# Altium PCB PCB.PcbDoc (part 1 of 2)
Units mm, origin at the board's own origin, x right, y up, seen from the top; angles counter-clockwise.
Board outline 57.59 x 65.03 mm, 2 copper layers (Top Layer, Bottom Layer); 72 components, 52 nets, 225 pads, 55 vias.
Unrouted connection lines stored in the file: 25.
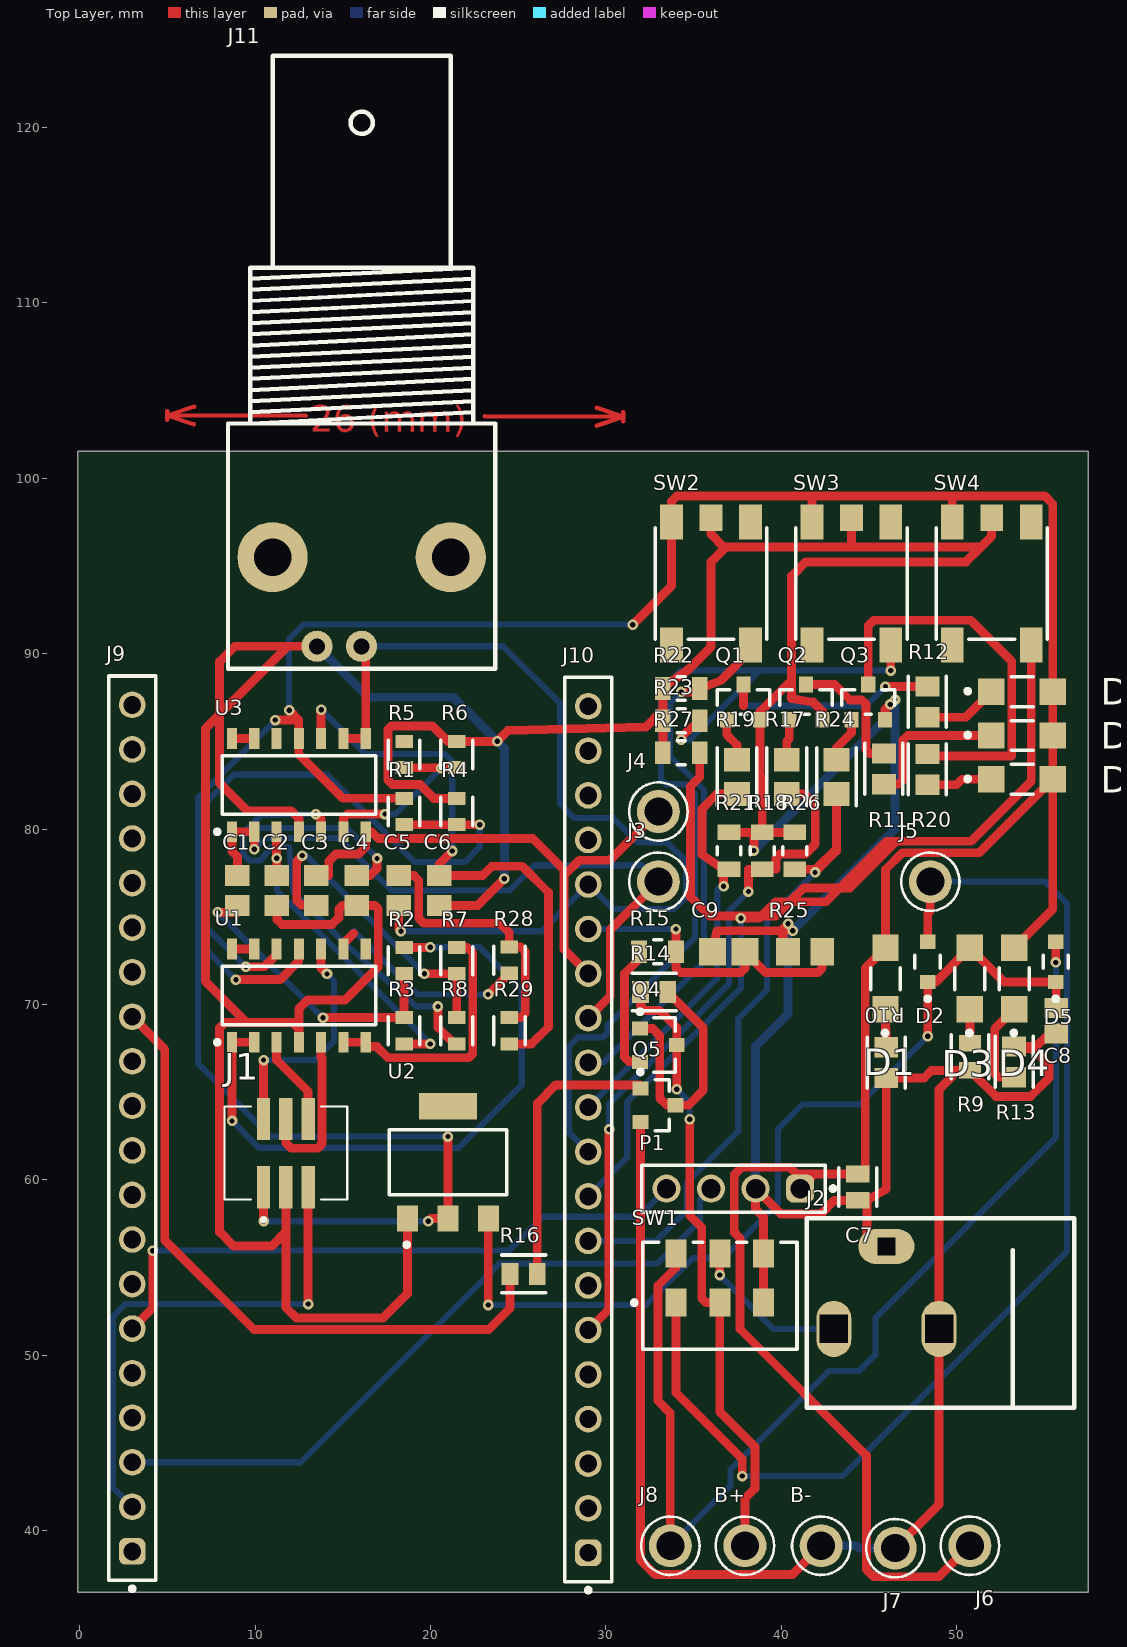
[diagram p0: Top Layer view]
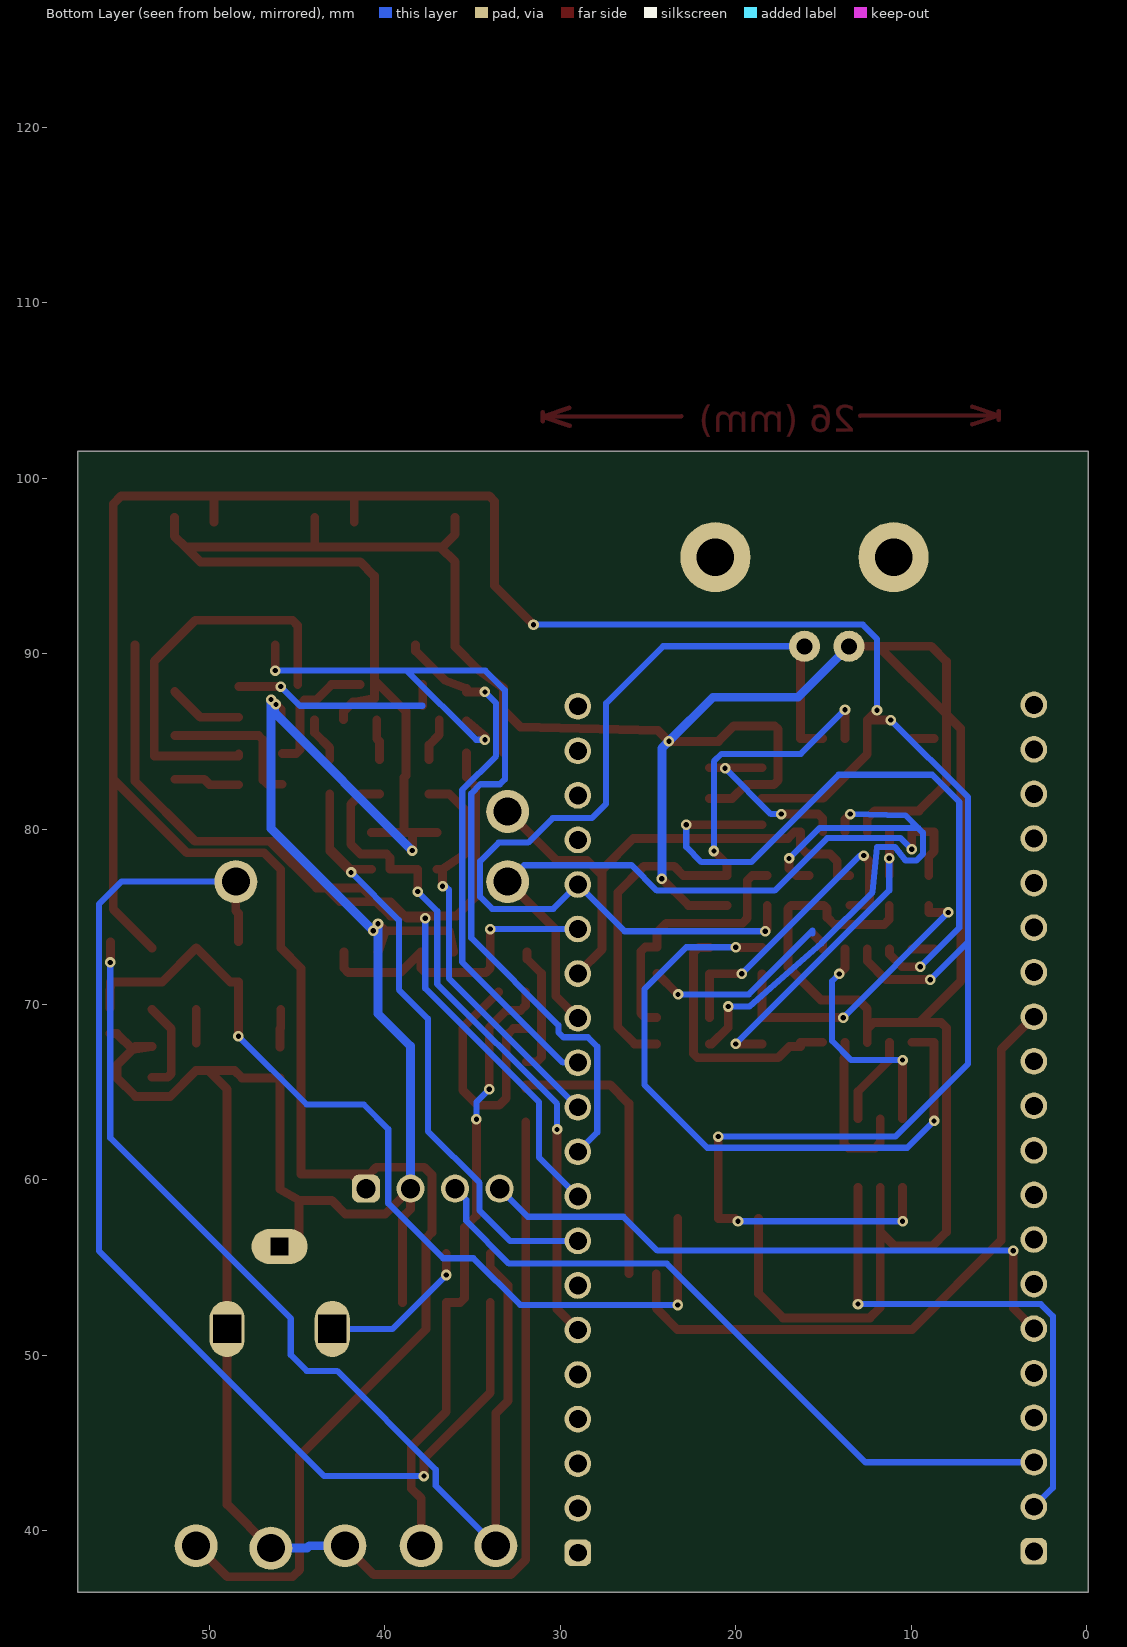
[diagram p1: Bottom Layer view, seen from below]
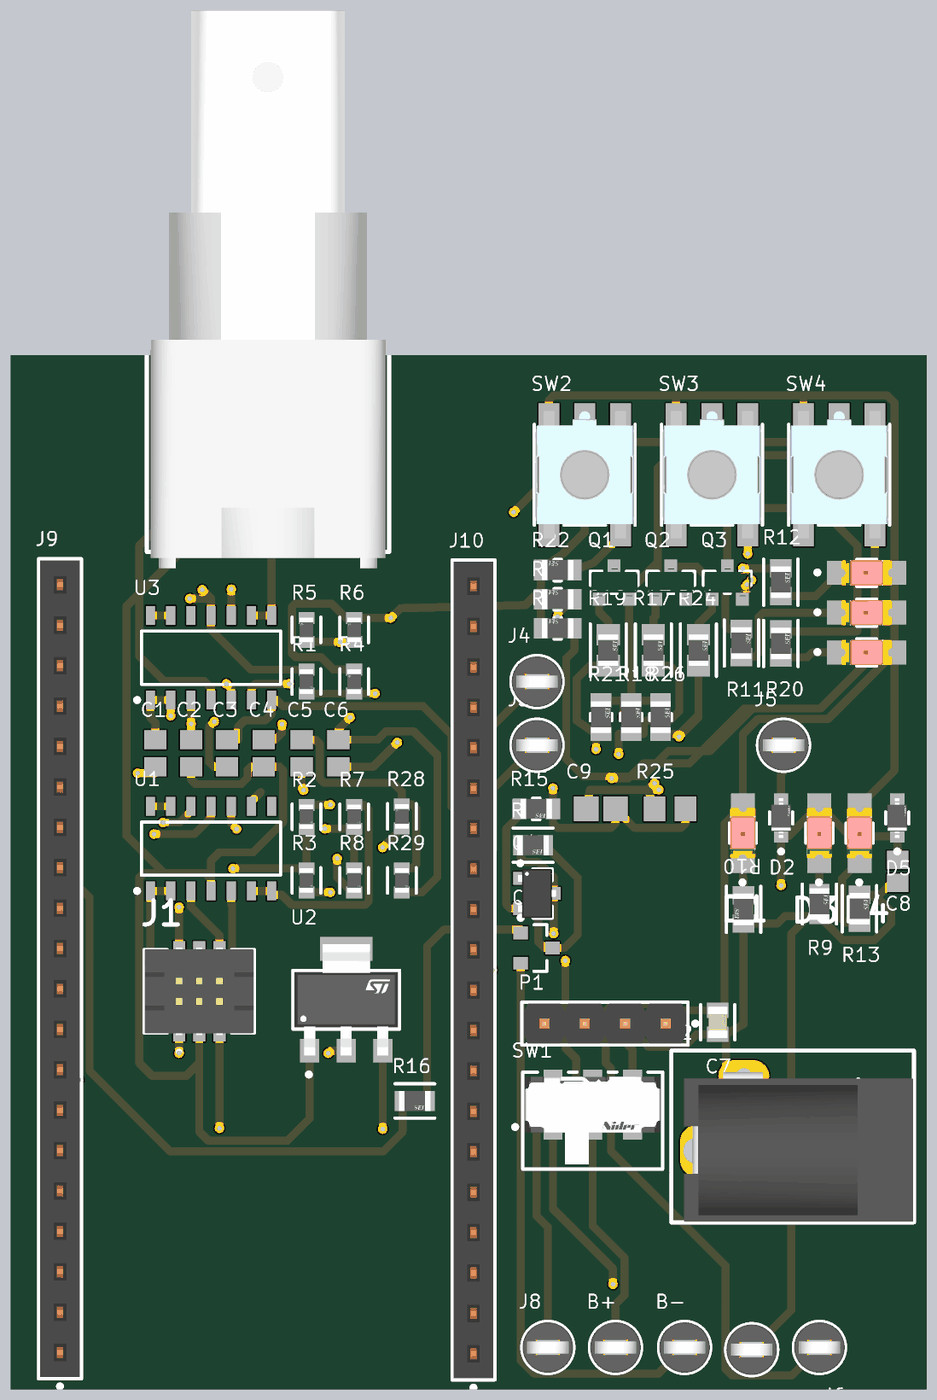
[diagram p2: 3D render of the assembled board from above, using the file's embedded part models]

## Layer stack, top to bottom
Top Solder: solder mask 0.0102, Solder Resist, Dk 3.5
Top Layer: signal copper 0.0356
Dielectric 1: dielectric 0.32, FR-4, Dk 4.8
Bottom Layer: signal copper 0.0356
Bottom Solder: solder mask 0.0102, Solder Resist, Dk 3.5

## Board outline
-0.094,36.5 57.5,36.5 57.5,101.532 -0.094,101.532

## Design rules (kind name [scope] priority, off if disabled: settings)
Clearance "Polygon Clearance" [InPolygon] p1: gap=0.254 ignorepadtopadclearanceinfootprint=TRUE
Clearance [All] p2: gap=0.152 ignorepadtopadclearanceinfootprint=TRUE
ComponentClearance [All] p1 off: gap=0.254 collisioncheckmode=3 verticalgap=0.254 showdistances=FALSE
FabricationTestPointUsage TestPointUsage [All] p1: valid=0 allowmultiple=FALSE
FabricationTestpoint Testpoint [All] p1: side=3 testpointundercomponent=TRUE minsize=1.016 maxsize=2.54 preferedsize=1.524 minholesize=0 maxholesize=1.016 preferedholesize=0.813 testpointgrid=0.025 allowsidetop=TRUE allowsidebottom=TRUE usegrid=TRUE gridtolerance=0
Height [All] p1: minheight=0 maxheight=55.4 prefheight=12.7
HoleSize [All] p1: absolutevalues=TRUE maxlimit=25.4 minlimit=0.2 maxpercent=80.000 minpercent=20.000
MinimumSolderMaskSliver [All] p1: minsoldermaskwidth=0.102
PlaneConnect [All] p1: planeconnectstyle=Relief reliefexpansion=0.254 reliefentries=4 reliefconductorwidth=0.254 reliefairgap=0.254
PolygonConnect PWRPolygonConnect [InNet('+V3.3') OR InNet('+V5') OR InNet('+VIN') OR InNetClass('GND')] p1: connectstyle=Relief reliefconductorwidth=0.305 reliefentries=4 polygonreliefangle="90 Angle" airgapwidth=0.254
PolygonConnect [All] p2: connectstyle=Relief reliefconductorwidth=0.305 reliefentries=4 polygonreliefangle="90 Angle" airgapwidth=0.254
RoutingVias [All] p1: holewidth=0.3 width=0.6 viastyle="Through Hole" minholewidth=0.3 minwidth=0.6 maxholewidth=0.3 maxwidth=0.6
SilkToSilkClearance [All] p1: silktosilkclearance=0.051
SilkToSolderMaskClearance SilkscreenOverComponentPads [All] p1: minsilkscreentomaskgap=0.051 clearancetoexposedcopper=TRUE
SolderMaskExpansion [All] p1: expansion=0.1 istentingtop=FALSE
SupplyNets "Schematic Supply Nets_3" [InNet('+3V3')] p1: voltage=0.000
SupplyNets "Schematic Supply Nets_2" [InNet('GND')] p2: voltage=0.000
Width "Width GND" [InNet('GND')] p1: maxlimit=0.508 minlimit=0.508 preferedwidth=0.508
Width "Width Power" [InNet('+V3.3') OR InNet('+V5') OR InNet('+VIN') OR InNetClass('PWR')] p2: maxlimit=0.508 minlimit=0.508 preferedwidth=0.508
Width [All] p3: maxlimit=0.5 minlimit=0.2 preferedwidth=0.5 bottomlayer_prefwidth=0.35 minimp=50.000000 maximp=50.000000 favimp=50.000000
21 further rules are at their usual default settings.

## Classes and differential pairs
component class "Top Level": J9 J10 J11
component class r: D6 D7 D8 P1 Q1 Q2 Q3 R11 R12 R17 R18 R19 R20 R21 R22 R23 R24 R26 R27 SW2 SW3 SW4
component class Sheet4: C1 C2 C3 C4 C5 C6 J3 J4 R1 R2 R3 R4 R5 R6 R7 R8 R28 R29 U1 U3
component class Sheet3: D1 J1 R10
component class Sheet2: B+ B+1 B- B-1 C7 C8 C9 D2 D3 D4 D5 J2 J5 J6 J7 J8 Q4 Q5 R9 R13 R14 R15 R16 R25 SW1 U2

## Components (designator, comment, footprint, x,y, rotation, side; value= is the part's Value field where it differs from the comment)
B+ "5006" FP-5006-MFG 37.933,39.14 r0 top
B- "5006" FP-5006-MFG 42.279,39.14 r0 top
C1 "33n" CAPC2013X95X45NL10T25 9,76.5 r90 top value="33 nF"
C2 "33n" CAPC2013X95X45NL10T25 11.246,76.5 r90 top value="33 nF"
C3 "33n" CAPC2013X95X45NL10T25 13.5,76.5 r90 top value="33 nF"
C4 "33n" CAPC2013X95X45NL10T25 15.802,76.5 r90 top value="33 nF"
C5 "33n" CAPC2013X95X45NL10T25 18.199,76.5 r90 top value="33 nF"
C6 "33n" CAPC2013X95X45NL10T25 20.503,76.5 r90 top value="33 nF"
C7 "0.1µF" FP-C0805C-DN-MFG 44.363,59.581 r270 top value="0.10 μF"
C8 "100nF" CAPC2013X94X50LL20T25 55.675,69.064 r90 top
C9 "10nF" CAPC2013X94X50ML20T25 37.011,73 r0 top value="10,000 pF"
D1 "LTST-C150KRKT" FP-LTST-C150KRKT-MFG 45.944,71.475 r90 top
D2 "CUS08F30,H3F" FP-USC-MFG 48.348,72.425 r90 top
D3 "LTST-C150KRKT" FP-LTST-C150KRKT-MFG 50.756,71.475 r90 top
D4 "LTST-C150KRKT" FP-LTST-C150KRKT-MFG 53.285,71.475 r90 top
D5 "CUS08F30,H3F" FP-USC-MFG 55.65,72.425 r90 top
D6 "LTST-C150KRKT" FP-LTST-C150KRKT-MFG 53.731,85.334 r0 top
D7 "LTST-C150KRKT" FP-LTST-C150KRKT-MFG 53.731,87.834 r0 top
D8 "LTST-C150KRKT" FP-LTST-C150KRKT-MFG 53.731,82.834 r0 top
J1 "20021221-00006C4LF" AMPHENOL_20021221-00006C4LF 11.759,61.53 r180 top
J2 "PJ-102AH" "CON Barrel PJ-102AH" 46,56.2 r180 top
J3 "5006" FP-5006-MFG 33,77 r0 top
J4 "5006" FP-5006-MFG 33,81 r0 top
J5 "5006" FP-5006-MFG 48.5,77 r0 top
J6 "5006" FP-5006-MFG 50.758,39.14 r0 top
J7 "5006" FP-5006-MFG 46.5,39 r0 top
J8 "5006" FP-5006-MFG 33.68,39.14 r0 top
J9 "61302011821" 61302011821 3,62.95 r90 top
J10 "61302011821" 61302011821 29,62.87 r90 top
J11 "CON BNC JACK R/A 50 OHM PCB" "CON BNC 90deg" 16.08,90.42 r270 top
P1 "61300411121" 61300411121 37.27,59.5 r180 top
Q1 "DMN2004K-7" FP-SOT23-MFG 37.849,87.234 r90 top
Q2 "DMN2004K-7" FP-SOT23-MFG 41.411,87.234 r90 top
Q3 "DMN2004K-7" FP-SOT23-MFG 44.963,87.234 r90 top
Q4 "SSM3J328R,LF" TOSH-SOT-23F_V 32.996,67.681 r0 top
Q5 "MMBT3904LT1G" ONSC-SOT-23-3-318-08_V 32.97,64.252 r0 top
R1 "160k" FP-CRCW0603-e3-MFG 18.5,81 r270 top
R2 "160k" FP-CRCW0603-e3-MFG 18.5,72.5 r270 top
R3 "160k" FP-CRCW0603-e3-MFG 18.5,68.5 r270 top
R4 "160k" FP-CRCW0603-e3-MFG 21.5,81 r90 top
R5 "160k" FP-CRCW0603-e3-MFG 18.5,84.25 r90 top
R6 "160k" FP-CRCW0603-e3-MFG 21.5,84.25 r90 top
R7 "160k" FP-CRCW0603-e3-MFG 21.5,72.5 r270 top
R8 "160k" FP-CRCW0603-e3-MFG 21.5,68.5 r270 top
R9 "3K" FP-RMCF0805-IPC_C 50.758,67.018 r90 top
R10 "300R" FP-RMCF0805-IPC_B 45.989,66.682 r270 top
R11 "300R" FP-RMCF0805-IPC_B 45.853,83.425 r90 top
R12 "300R" FP-RMCF0805-IPC_B 48.329,87.248 r90 top
R13 "300R" FP-RMCF0805-IPC_B 53.28,66.721 r90 top
R14 "RMCF0805FG100K" FP-RMCF0805-IPC_C 32.752,70.711 r0 top
R15 "10K" FP-RMCF0805-MFG 32.95,73 r0 top
R16 "RMCF0805FT1K00" FP-RMCF0805-IPC_C 25.313,54.64 r0 top
R17 "100R" FP-RMCF0805-IPC_A 40.315,82.975 r90 top
R18 "10K" FP-RMCF0805-MFG 38.92,78.763 r90 top
R19 "100R" FP-RMCF0805-IPC_A 37.48,82.975 r90 top
R20 "300R" FP-RMCF0805-IPC_B 48.329,83.4 r90 top
R21 "10K" FP-RMCF0805-MFG 37.024,78.763 r90 top
R22 "10K" FP-RMCF0805-MFG 34.3,88.009 r180 top
R23 "10K" FP-RMCF0805-MFG 34.3,86.175 r180 top
R24 "100R" FP-RMCF0805-IPC_A 43.15,82.975 r90 top
R25 "5.6K" RESC2013X70X40ML20T20 41.361,73 r0 top
R26 "10K" FP-RMCF0805-MFG 40.771,78.763 r90 top
R27 "10K" FP-RMCF0805-MFG 34.3,84.353 r180 top
R28 "16k" FP-CRCW0603-e3-MFG 24.5,72.525 r90 top
R29 "16k" FP-CRCW0603-e3-MFG 24.5,68.5 r270 top
SW1 "CL-SB-22A-11T" FP-CL-SB-22A-11T-MFG 36.5,53.4 r0 top
SW2 "431481031816" 431481031816 36,94 r270 top
SW3 "431481031816" 431481031816 44,94 r270 top
SW4 "431481031816" 431481031816 52,94 r270 top
U1 "LM324DR2G" ONSC-SOIC-14-751A-03_V 12.5,70.5 r90 top
U2 "LDO 3.3V" FP-SOT-223-0046067_14-MFG 21,61 r90 top
U3 "LM324DR2G" ONSC-SOIC-14-751A-03_V 12.5,82.5 r90 top

## Footprints (in the part's own frame and the unit in brackets; to place one, negate y for a bottom-side part, rotate by r counter-clockwise, add the part's x,y. Pads: shape width x height; smd on the part's side, far side on the other; paste and mask are expansions set on the pad)
61300411121 [mm] "Pin Header, pitch 2.54 mm, THT, Vertical, single row, 4p"
  rrect50% 1.6x1.6 hole 1.1: 1(-3.81,0)
  round 1.6 hole 1.1: 2(-1.27,0) 3(1.27,0) 4(3.81,0)
  silkscreen extent -5.8,-1.34 5.23,1.35, body extent -5.08,-1.27 5.08,1.27, height 8.57
61302011821 [mm] "Socket Header, Pitch 2.54 mm, THT, Vertical, single row, 20p"
  rrect50% 1.52x1.52 hole 1.02: 1(-24.13,0)
  round 1.52 hole 1.02: 2(-21.59,0) 3(-19.05,0) 4(-16.51,0) 5(-13.97,0) 6(-11.43,0) 7(-8.89,0) 8(-6.35,0) 9(-3.81,0) 10(-1.27,0) 11(1.27,0) 12(3.81,0) 13(6.35,0) 14(8.89,0) 15(11.43,0) 16(13.97,0) 17(16.51,0) 18(19.05,0) 19(21.59,0) 20(24.13,0)
  silkscreen extent -26.38,-1.35 25.78,1.35, body extent -25.65,-1.25 25.65,1.25, height 8.55
431481031816 [mm] "SMD Tact Switch, body 6x6mm"
  rect 2x1.3 smd: A1(-3.5,-2.25) A2(3.5,-2.25) B1(-3.5,2.25) B2(3.5,2.25)
  rect 1.5x1.3 smd: G1(-3.75,0)
  silkscreen extent -3.18,-3.18 3.18,3.18, body extent -4,-3.1 4,3.1, height 3.1
AMPHENOL_20021221-00006C4LF [mm]
  rect 0.76x2.4 smd: 1(1.27,1.95) 2(1.27,-1.95) 3(0,1.95) 4(0,-1.95) 5(-1.27,1.95) 6(-1.27,-1.95)
  silkscreen extent -3.49,-2.65 3.49,3.91, body extent -3.4,-2.75 3.4,2.75, height 5.6
CAPC2013X94X50LL20T25 [mm] "Chip Capacitor, 2-Leads, Body 2.01x1.25mm, IPC High Density"
  rect 1.15x1.35 smd: 1(-0.725,0) 2(0.725,0)
  body extent -1.1,-0.72 1.1,0.72, height 0.94
CAPC2013X94X50ML20T25 [mm] "Chip Capacitor, 2-Leads, Body 2.01x1.25mm, IPC Low Density"
  rect 1.55x1.55 smd: 1(-0.925,0) 2(0.925,0)
  body extent -1.1,-0.72 1.11,0.72, height 0.94
CAPC2013X95X45NL10T25 [mm] "Chip Capacitor, 2-Leads, Body 2.00x1.25mm, IPC Medium Density"
  rect 1.2x1.4 smd: 1(-0.85,0) 2(0.85,0)
  body extent -1.05,-0.67 1.05,0.67, height 0.95
"CON Barrel PJ-102AH" [mm] "5.5mm Barrel Plug (2.1mm ID)"
  oval 2x3.2 hole 1.6 square: 1(3,4.7) 2(-3,4.7)
  oval 3.2x2 hole 1 square: 3(0,0)
  silkscreen extent -10.7,-1.6 4.55,9.2, body extent -10.65,-0.25 3.75,9.15, height 11.01
"CON BNC 90deg" [mil] "BNC INSULATED 90 Degrees"
  round 70 hole 36: 1(0,0) 2(0,-100)
  round 157.48 hole 84: ""(-200,200) ""(-200,-200)
  silkscreen extent -1325,-300 50,300, body extent -1290,-290 90,291, height 605
FP-5006-MFG [mm]
  round 2.45 hole 1.6 paste-2539.97 mask+0: 1(0,0)
  silkscreen extent -1.66,-1.66 1.67,1.66, body extent -1.77,-1.77 1.77,1.77, height 0.25
FP-C0805C-DN-MFG [mm]
  rect 0.95x1.35 smd paste+0 mask+0: 1(-0.75,0) 2(0.75,0)
  silkscreen extent -1.1,-1.08 1.1,1.07, body extent -1.4,-0.85 1.4,0.85, height 0.25
FP-CL-SB-22A-11T-MFG [mm]
  rect 1.2x1.6 smd paste+0 mask+0: 1(-2.5,-0.4) 2(0,-0.4) 3(2.5,-0.4) 4(-2.5,2.4) 5(0,2.4) 6(2.5,2.4)
  silkscreen extent -5,-3.05 4.4,3.05, body extent -4.5,-3.15 4.5,3.3, height 0.25
FP-CRCW0603-e3-MFG [mm]
  rect 0.75x1 smd paste+0 mask+0: 1(-0.75,0) 2(0.75,0)
  silkscreen extent -0.8,-0.9 0.8,0.9, body extent -1.22,-0.6 1.22,0.6, height 0.25
FP-LTST-C150KRKT-MFG [mm]
  rect 1.5x1.5 smd paste+0 mask+0: 1(-1.75,0) 2(1.75,0)
  silkscreen extent -3.22,-0.85 0.63,0.85, body extent -2.6,-0.95 2.6,0.95, height 0.25
FP-RMCF0805-IPC_A [mm]
  rect 1.355x1.462 smd paste+0 mask+0: 1(-0.976,0) 2(0.976,0)
  silkscreen extent -1.65,-1.13 1.65,1.13, body extent -2.15,-1.23 2.15,1.23, height 0.25
FP-RMCF0805-IPC_B [mm]
  rect 1.155x1.362 smd paste+0 mask+0: 1(-0.876,0) 2(0.876,0)
  silkscreen extent -1.45,-1.08 1.45,1.08, body extent -1.7,-0.93 1.7,0.93, height 0.25
FP-RMCF0805-IPC_C [mm]
  rect 0.955x1.262 smd paste+0 mask+0: 1(-0.776,0) 2(0.776,0)
  silkscreen extent -1.25,-1.08 1.25,1.07, body extent -1.35,-0.77 1.35,0.77, height 0.25
FP-RMCF0805-MFG [mm]
  rect 0.9x1.3 smd paste+0 mask+0: 1(-1.05,0) 2(1.05,0)
  silkscreen extent -0.22,-0.68 0.23,0.67, body extent -1.6,-0.77 1.6,0.77, height 0.25
FP-SOT23-MFG [mm]
  rect 0.9x0.8 smd paste+0 mask+0: 1(-1,0.95) 2(-1,-0.95) 3(1,0)
  silkscreen extent -0.7,-1.5 0.7,1.5, body extent -1.55,-1.6 1.55,1.6, height 0.25
FP-SOT-223-0046067_14-MFG [mm]
  rect 1.5x1.2 smd paste+0 mask+0: 1(-3.2,2.3) 2(-3.2,0) 3(-3.2,-2.3)
  rect 1.5x3.3 smd paste+0 mask+0: 4(3.2,0)
  silkscreen extent -4.82,-3.35 1.85,3.35, body extent -4.05,-3.45 4.05,3.45, height 0.25
FP-USC-MFG [mm]
  rect 0.8x0.9 smd paste+0 mask+0: 1(-1.15,0) 2(1.15,0)
  silkscreen extent -2.22,-0.73 0.37,0.72, body extent -1.65,-0.82 1.65,0.82, height 0.25
ONSC-SOIC-14-751A-03_V [mm] "SOIC, 14-Leads, Body 8.75x4mm, Pitch 1.27mm"
  rect 1.18x0.58 smd: 1(-2.66,3.81) 2(-2.66,2.54) 3(-2.66,1.27) 4(-2.66,0) 5(-2.66,-1.27) 6(-2.66,-2.54) 7(-2.66,-3.81) 8(2.66,-3.81) 9(2.66,-2.54) 10(2.66,-1.27) 11(2.66,0) 12(2.66,1.27) 13(2.66,2.54) 14(2.66,3.81)
  silkscreen extent -2.78,-4.37 1.67,4.77, body extent -2,-4.38 2,4.38, height 1.75
ONSC-SOT-23-3-318-08_V [mm] "SOT23, 3-Leads, Body 2.92x1.3mm, Pitch 0.95mm"
  rect 0.9x0.8 smd: 1(-1,0.95) 2(-1,-0.95) 3(1,0)
  silkscreen extent -1.12,-1.46 0.65,2.02, body extent -0.65,-1.46 0.65,1.46, height 1.11
RESC2013X70X40ML20T20 [mm] "Chip Resistor, 2-Leads, Body 2.00x1.25mm, IPC Low Density"
  rect 1.35x1.55 smd: 1(-0.975,0) 2(0.975,0)
  body extent -1.1,-0.72 1.1,0.72, height 0.7
TOSH-SOT-23F_V [mm] "SOTFL, 3-Leads, Body 3.1x1.9mm, Pitch 0.95mm"
  rect 0.9x0.8 smd: 1(-1.05,0.95) 2(-1.05,-0.95) 3(1.05,0)
  silkscreen extent -1.17,-1.55 0.95,2.02, body extent -1.2,-1.55 1.2,1.55, height 0.88

## Part data
B+ B- J3 J4 J5 J6 J7 J8: library part CMP-19636-000022-1, "PC TEST POINT COMPACT BLACK", Color=Black, Flammability Rating="UL94 V-0", Package Quantity=100, Body Material=Bronze, Contact Material=Bronze, Contact Plating=Tin, Height=0.35inch, Hole Diameter=1.6mm, Housing Color=Black, Inside Diameter=1.78mm, Insulation Material=Nylon, Lead Free="Lead Free", Length=8.89mm, Material=Nylon, Mount=PCB, Number of Ports=1, Orientation=Straight, Outside Diameter=3.18mm, Packaging=Bulk, Plating=Silver, REACH SVHC="No SVHC", RoHS Compliant=Yes, Series=THM
C1 C2 C3 C4 C5 C6: library part CMP-03422-000099-1, "CAP CER 0.033UF 50V X7R 0805, CC0805KRX7R9BB333", Capacitance="33 nF", Manufacturer=Yageo, Manufacturer Part Number=CC0805KRX7R9BB333, Package=CC0805-0.85, Temperature="-30°C to +85°C", Temperature Characteristic=X7R, Temperature Range High=+85°C, Temperature Range Low=-30°C, Tolerance=0.1, Voltage Rating="50 V", Automotive=No, Category=Cap, ComponentLink2Description=Datasheet, ComponentLink2URL=http://www.yageo.com/documents/recent/UPY-GPHC_Y5V_6.3V-to-50V_8.pdf, Device Class L1="Passive Components", Device Class L2=Capacitors, Device Class L3="Ceramic Capacitors", Digikey Description="CAP CER 0.033UF 50V X7R 0805", Footprint Url=http://www.yageo.com/exep/pages/download/literatures/UPY-C_GEN_24.pdf, Height=0.95mm, Ipc Land Pattern Name=CAPC200125X85, Lead Free=Yes, Material=Ceramic, Mouser Description="Multilayer Ceramic Capacitors MLCC - SMD/SMT 33nF 50V X7R 10%", Octopart=https://octopart.com/cc0805krx7r9bb333-yageo-42333931, RoHS=TRUE
C7: library part CMP-03020-000950-1, "CAP CER 0.1UF 50V X7R 0805", Capacitance="0.10 μF", Manufacturer=KEMET, Manufacturer Part Number=C0805C104J5RACTU, Package=C0805C-DN, Temperature="-55°C to +125°C", Temperature Characteristic=X7R, Temperature Coefficient=30ppm/°C, Temperature Range High=+125°C, Temperature Range Low=-55°C, Tolerance=0.05, Voltage Rating="50 V", Automotive=No, Category=Cap, ComponentLink2Description=Datasheet, ComponentLink2URL=https://content.kemet.com/datasheets/KEM_C1003_C0G_SMD.pdf, Device Class L1="Passive Components", Device Class L2=Capacitors, Device Class L3="Ceramic Capacitors", Digikey Description="CAP CER 0.1UF 50V X7R 0805", Height=0.88mm, Ipc Land Pattern Name=CAPC200125X78, Lead Free=Yes, Material=Ceramic, Mouser Description="Multilayer Ceramic Capacitors MLCC - SMD/SMT 50volts 0.1uF X7R 5%", Octopart=https://octopart.com/c0805c104j5ractu-kemet-104634, RoHS=TRUE
C8: library part CMP-2007-04369-1, Manufacturer="AVX Interconnect / Elco", Part Number=08055C104JAZ2A
C9: library part CMP-2007-01173-3, "CAP CER SMD 0805 .01UF X7R 5% 50, C0805C103J5RAC7210", Capacitance="10,000 pF", Manufacturer=KEMET, Manufacturer Part Number=C0805C103J5RAC7210, Package=C0805C-DN, Temperature="-55°C to +125°C", Temperature Characteristic=X7R, Temperature Coefficient=30ppm/°C, Temperature Range High=+125°C, Temperature Range Low=-55°C, Tolerance=0.05, Voltage Rating="50 V", Automotive=No, Category=Cap, ComponentLink2Description=Datasheet, ComponentLink2URL=https://content.kemet.com/datasheets/KEM_C1003_C0G_SMD.pdf, Device Class L1="Passive Components", Device Class L2=Capacitors, Device Class L3="Ceramic Capacitors", Digikey Description="CAP CER SMD 0805 .01UF X7R 5% 50", Height=0.88mm, Ipc Land Pattern Name=CAPC200125X78, Lead Free=Yes, Material=Ceramic, Mouser Description="Cap Ceramic 0.01uF 50V X7R 5% Pad SMD 0805 125C T/R", Octopart=https://octopart.com/c0805c103j5rac7210-kemet-3921106, RoHS=TRUE
D1 D3 D4 D6 D7 D8: library part CMP-2000-06617-2, "LED RED CLEAR 1206 SMD", Case Code (Imperial)=1206, Case Code (Metric)=3216, Color=Red, Forward Current=30mA, Forward Voltage=2V, Lens Color=Colorless, Max Operating Temperature=85°C, Min Operating Temperature=-30°C, Package Quantity=1, Power Dissipation=62.5mW, Power Rating=75mW, Reverse Voltage=5V, Test Current=20mA, Case/Package=1206, Depth=1.6mm, Dominant Wavelength=631nm, Height=1.1mm, Illumination Color=Red, Lead Free="Lead Free", Length=3.2mm, Lens Style=Diffused, Lens Transparency=Clear, Luminous Intensity=54mcd, Mount="Surface Mount", Number of Elements=1, Number of LEDs=1, Number of Pins=2, Packaging="Tape and Reel", Radiation Hardening=No, Viewing Angle=130°, Wavelength=639nm, Width=1.6mm
D2 D5: library part CMP-00375-53632863-1, "CUS08F30,H3F Rectifier Diode, Schottky, 1 Phase, 1 Element, 0.8A, 30V V(RRM), Silicon", Average Rectified Current=800mA, Capacitance=170pF, Case/Package=SOD, Max Forward Surge Current (Ifsm)=5A, Max Junction Temperature (Tj)=125°C, Max Repetitive Reverse Voltage (Vrrm)=30V, Min Operating Temperature=-55°C, Peak Reverse Current=50µA, Contact Plating="Silver, Tin", Element Configuration=Single, Forward Current=800mA, Height=1.15mm, Max Operating Temperature=125°C, Max Reverse Voltage (DC)=30V, Mount="Surface Mount", NexarPartId=53632863, Number of Pins=2, Packaging=Digi-Reel®, Peak Non-Repetitive Surge Current=5A, Reverse Voltage=30V, RoHS=Compliant, Schedule B="8541100080, 8541100080"
J1: "Minitek127®, Wire to Board connector, Shrouded vertical header, Surface Mount, Double Row, 6 Positions, 1.27mm (0.500in) Pitch", Package=None, Supplier Part Number 1=609-3699-1-ND, Check_prices=https://www.snapeda.com/parts/20021221-00006C4LF/Framatome+Connectors/view-part/?ref=eda, MF=FCI, MP=20021221-00006C4LF, SnapEDA_Link=https://www.snapeda.com/parts/20021221-00006C4LF/Framatome+Connectors/view-part/?ref=snap, Supplier 1=Digikey, Supplier 2=Digikey, Supplier Part Number 2=609-3699-1-ND
J2: library part "CON PWR PJ-102AH", "2.0 x 6.5 mm, 5.0 A, Horizontal, Through Hole, Tapered Pins, Dc Power Jack Connector", Manufacturer="CUI Devices", Supplier Part Number=CP-102AH-ND, ComponentLink1Description=https://datasheet.octopart.com/PJ-102AH-Same-Sky-datasheet-182049965.pdf?src-supplier=Future+Electronics, ComponentLink1URL=https://datasheet.octopart.com/PJ-102AH-Same-Sky-datasheet-182049965.pdf?src-supplier=Future+Electronics, ComponentLink2Description=http://www.cui.com/Product/Resource/FuturePDF/PJ-102AH.pdf?src-supplier=Future+Electronics, ComponentLink2URL=http://www.cui.com/Product/Resource/FuturePDF/PJ-102AH.pdf?src-supplier=Future+Electronics, ComponentLink3Description=https://datasheet.octopart.com/PJ-102AH-Same-Sky-datasheet-182881008.pdf?src-supplier=Electro+Sonic, ComponentLink3URL=https://datasheet.octopart.com/PJ-102AH-Same-Sky-datasheet-182881008.pdf?src-supplier=Electro+Sonic, Digikey Order=CP-102AH-ND, Manufacturer Code=PJ-102AH, Manufacturer Part Number=PJ-102AH, Pricing="1=0.76, 10=0.646, 25=0.6056, 50=0.5766, 200=0.5227, 400=0.4977, 600=0.48367, 1000=0.46653, 2600=0.43611 (USD)", RoHS=No, Stock=44670, Supplier=Digikey, Supplier 1="Arrow Electronics", Supplier 2=Digikey, Supplier Part Number 1=PJ-102AH, Supplier Part Number 2=CP-102AH-ND
J9 J10: library part CMP-1502-01348-3, Contact Resistance=20mΩ, Current Rating=3A, Operating Supply Voltage=250V, Gender=Female, Lead Pitch=2.54mm, NexarPartId=61924744, Number of Pins=20, Orientation=Vertical, RoHS=Non-Compliant
J11: "BNC Connector Jack, Female Socket 50Ohm Panel Mount, Through Hole, Right Angle Solder", Manufacturer="TE Connectivity AMP Connectors", Manufacturer Code=1-1634613-0, Supplier Part Number 1=A32261-ND, Digikey Order=A97554-ND, Supplier 1=Digikey, Supplier 2=Rs, Supplier Part Number 2=6807399
P1: library part CMP-1502-01064-3, Color=Black, Contact Resistance=20mΩ, Current Rating=3A, Max Operating Temperature=105°C, Min Operating Temperature=-40°C, Operating Supply Voltage=250V, Connector Type="Male Pin", Contact Material=Copper, Contact Mating Length=5.9944mm, Contact Plating=Gold, Gender=Male, Height=8.89mm, Lead Free="Lead Free", Lead Pitch=2.54mm, Mount="Through Hole", NexarPartId=32855522, Number Of Contacts=4, Number of Pins=4, Number of Positions=4, Number of Rows=1, Orientation=Vertical, Packaging=Bulk, Pitch=2.54mm, REACH SVHC=Unknown, RoHS=Compliant, Termination=Solder, Voltage Rating=250V
Q1 Q2 Q3: library part CMP-12801-000057-1, "MOSFET N-CH 20V 0.63A SOT23-3", Continuous Drain Current=630mA, Drain To Source Breakdown Voltage=20V, Drain To Source Resistance=0.4Ω, Gate To Source Voltage=8V, Input Capacitace At Vds="150pF @ 16V", Manufacturer="Diodes Inc.", Max Forward Diode Voltage=1V, Max Junction Temp=+150°C, Package=SOT23, Power Dissipation=350mW, Pulse Drain Current=1.5A, Temperature="-65°C to +150°C", Temperature Range Low=-65°C, Automotive=Yes, Automotive Grade="Grade 0", Category=Trans, ComponentLink2Description=Datasheet, ComponentLink2URL=https://www.diodes.com/assets/Datasheets/ds30938.pdf, Depletion Mode=False, Device Class L1="Discrete Semiconductors", Device Class L2=Transistors, Device Class L3=MOSFETs, Digikey Description="MOSFET N-CH 20V 0.63A SOT23-3", Drain To Source Voltage=20V, Footprint Url=https://www.diodes.com/assets/Package-Files/SOT23.pdf, Gate Charge At Vgs="0.9nC @ 4.5V", Height=1.1mm, Lead Free=Yes, Manufacturer Part Number=DMN2004K-7, Mouser Description="MOSFET 20V 540mA", Number Of Channels=1, Number Of N Channels=1, Octopart=https://octopart.com/dmn2004k-7-diodes+inc.-7127688, Reverse Recovery Charge=0.85nC, Reverse Recovery Time=5.5ns, RoHS=TRUE, Rthja Max=357°C/W, Standoff Height=0.013mm, Temperature Range High=+150°C, Threshold Vgs Max=1V, Threshold Vgs Min=0.5V, Turn Off Delay Time=59.4ns, Turn On Delay Time=5.7ns
Q4: library part CMP-2100-03686-1, "TOSHIBA Field-Effect Transistor Silicon P-Channel MOS Type (U-MOS VI), 20 V, -55 to 125 degC, 3-Pin SOTFL, RoHS, Tape and Reel", Package Quantity=3000, Package Description="3-Pin Small Outline Transistor, Flat Lead, Body 2.9 x 1.8 mm, Pitch 0.95 mm", Package Reference=SOT-23F, Drain To Source Breakdown Voltage=-20V, Power Dissipation=2W, Min Operating Temperature=-55degC, Max Operating Temperature=150degC, Manufacturer=Toshiba, Input Capacitance=840pF, Gate to Source Voltage (Vgs)=8V, Drain to Source Voltage (Vdss)=20V, Drain To Source Resistance=47.4mOhm, Continuous Drain Current (ID)=6A, Case/Package=SOT-23-3, Max Power Dissipation=1W, Number of Elements=1, Number Of Channels=1, Number of Pins=3, Packaging=TapeandReel, Radiation Hardening=No, Rds On Max=29.8mOhm, Mount=SurfaceMount, RoHSCompliant=true, Package URL=https://toshiba.semicon-storage.com/ap-en/design-support/package/detail.SOT-23F.html, Turn-On Delay Time=32ns, Manufacturer URL=http://www.toshiba.com/, Element Configuration=Single, Turn-Off Delay Time=107ns, Datasheet Version=41699.0, Datasheet URL=https://toshiba.semicon-storage.com/info/docget.jsp?did=2429&prodName=SSM3J328R
Q5: library part CMP-1048-00631-1, "General Purpose Transistor, NPN Silicon, 3-Pin SOT-23, Pb-Free, Tape and Reel", Manufacturer="On Semiconductor", IC Continuous (A)=0.2, PartNumber=MMBT3904LT1G, Packing="Tape and Reel", PackageVersion="Rev. AP, 11/2009", PackageReference=SOT-23-3-318-08, PackageDescription="3-Pin Small Outline Transistor, Body 2.92 x 1.3 mm, Pitch 0.95 mm", Mounting Technology="Surface Mount", fT Min (MHz)=300, RoHS=TRUE, ComponentLink3URL=http://www.onsemi.cn/pub_link/Collateral/318-08.PDF, ComponentLink3Description="Package Specification", ComponentLink2URL=http://www.onsemi.cn/pub_link/Collateral/MMBT3904LT1-D.PDF, ComponentLink2Description=Datasheet, ComponentLink1URL=http://www.onsemi.com/, ComponentLink1Description="Manufacturer URL", Polarity=NPN, DatasheetVersion="Rev. 12"
R1 R2 R3 R4 R5 R6 R7 R8 R28 R29: library part CMP-26527-003058-1, "160kΩ ±5% 0.125W 0805 Thick Film Chip Resistor AEC-Q200 compliant, RMCF0805JT160K", Case Code (Imperial)=0805, Case Code (Metric)=2012, Max Operating Temperature=155°C, Max Power Dissipation=125mW, Min Operating Temperature=-55°C, Resistance=160kR, Resistor Type="Thick Film", Temperature Coefficient=200ppm/°C, Tolerance=5%, Case/Package=0805, Contact Plating=Tin, Features="Automotive AEC-Q200", Height=0.026inch, Lead Free="Lead Free", Length=0.079inch, Mount="Surface Mount", Number of Terminations=2, Packaging="Tape and Reel", Radiation Hardening=No, RoHS Compliant=Yes, Series=RMCF, Width=0.049inch
R9: library part CMP-26527-006913-1, "3kΩ ±5% 0.125W 0805 Thick Film Chip Resistor AEC-Q200 compliant", Case Code (Imperial)=0805, Case Code (Metric)=2012, Max Operating Temperature=155°C, Max Power Dissipation=125mW, Min Operating Temperature=-55°C, Resistance=3kR, Resistor Type="Thick Film", Temperature Coefficient=200ppm/°C, Tolerance=5%, Case/Package=0805, Construction=Rectangular, Contact Plating=Tin, Depth=1.25mm, Features="Automotive AEC-Q200", Height=0.026inch, Length=0.079inch, Military Standard=Not, Mount="Surface Mount", Number of Terminations=2, Packaging="Tape and Reel", Radiation Hardening=No, RoHS Compliant=Yes, Series=RMCF, Width=0.049inch
R10: library part CMP-26527-003681-1, "300Ω ±5% 0.125W 0805 Thick Film Chip Resistor AEC-Q200 compliant, RMCF0805JT300R", Case Code (Imperial)=0805, Case Code (Metric)=2012, Max Operating Temperature=155°C, Max Power Dissipation=125mW, Min Operating Temperature=-55°C, Temperature Coefficient=200ppm/°C, Tolerance=5%, Package Quantity=5000, Resistor Type="Thick Film", Case/Package=0805, Contact Plating=Tin, Features="Automotive AEC-Q200", Height=0.026inch, Length=0.079inch, Number of Terminations=2, Packaging="Tape and Reel", Radiation Hardening=No, Resistance=300R, Width=0.049inch, Mount="Surface Mount", Series=RMCF, RoHS Compliant=Yes
R11 R20: library part CMP-26527-003681-1, "300Ω ±5% 0.125W 0805 Thick Film Chip Resistor AEC-Q200 compliant, RMCF0805JT300R", Resistor Type="Thick Film", Package Quantity=5000, Temperature Coefficient=200ppm/°C, Max Power Dissipation=125mW, Max Operating Temperature=155°C, Case/Package=0805, Case Code (Metric)=2012, Tolerance=5%, Min Operating Temperature=-55°C, Number of Terminations=2, Series=RMCF, RoHS Compliant=Yes, Resistance=300R, Radiation Hardening=No, Packaging="Tape and Reel", Mount="Surface Mount", Width=0.049inch, Length=0.079inch, Height=0.026inch, Features="Automotive AEC-Q200", Contact Plating=Tin, Case Code (Imperial)=0805
R12: library part CMP-26527-003681-1, "300Ω ±5% 0.125W 0805 Thick Film Chip Resistor AEC-Q200 compliant, RMCF0805JT300R", Temperature Coefficient=200ppm/°C, Tolerance=5%, Case Code (Metric)=2012, Case/Package=0805, Max Operating Temperature=155°C, Max Power Dissipation=125mW, Package Quantity=5000, Min Operating Temperature=-55°C, Resistor Type="Thick Film", Height=0.026inch, Resistance=300R, Series=RMCF, Contact Plating=Tin, Features="Automotive AEC-Q200", Length=0.079inch, Width=0.049inch, Number of Terminations=2, RoHS Compliant=Yes, Packaging="Tape and Reel", Radiation Hardening=No, Case Code (Imperial)=0805, Mount="Surface Mount"
R13: library part CMP-26527-003681-1, "300Ω ±5% 0.125W 0805 Thick Film Chip Resistor AEC-Q200 compliant, RMCF0805JT300R", Case/Package=0805, Tolerance=5%, Min Operating Temperature=-55°C, Package Quantity=5000, Resistor Type="Thick Film", Max Power Dissipation=125mW, Max Operating Temperature=155°C, Case Code (Metric)=2012, Temperature Coefficient=200ppm/°C, Resistance=300R, RoHS Compliant=Yes, Mount="Surface Mount", Number of Terminations=2, Radiation Hardening=No, Series=RMCF, Packaging="Tape and Reel", Width=0.049inch, Height=0.026inch, Features="Automotive AEC-Q200", Contact Plating=Tin, Case Code (Imperial)=0805, Length=0.079inch
R14: library part CMP-26527-003818-1, "100kΩ ±1% 0.125W 0805 Thick Film Chip Resistor AEC-Q200 compliant", Case/Package=0805, Resistance=100kR, Tolerance=1%, Min Operating Temperature=-55°C, Max Power Dissipation=125mW, Resistor Type="Thick Film", Package Quantity=10000, Max Operating Temperature=155°C, Case Code (Metric)=2012, Temperature Coefficient=100ppm/°C, RoHS Compliant=Yes, Military Standard=Not, Mount="Surface Mount", Number of Terminations=2, Radiation Hardening=No, Packaging="Tape and Reel", Series=RMCF, Width=0.049inch, Height=0.026inch, Features="Automotive AEC-Q200", Depth=1.25mm, Contact Plating=Tin, Construction=Rectangular, Case Code (Imperial)=0805, Length=0.079inch
R15 R22: library part CMP-26527-000121-1, "RES 10K OHM 1% 1/8W 0805, RMCF0805FT10K0", Case/Package=0805, Power Rating=125mW, Resistance=10kR, Tolerance=1%, Min Operating Temperature=-55°C, Resistor Type="Thick Film", Max Operating Temperature=155°C, Case Code (Metric)=2012, Temperature Coefficient=100ppm/°C, Lead Free="Lead Free", RoHS Compliant=Yes, Military Standard=Not, Mount="Surface Mount", Number of Terminations=2, Series=RMCF, Radiation Hardening=No, Size Code=0805, Max Power Dissipation=125mW, Packaging="Tape and Reel", Width=0.049inch, Height=0.026inch, Features="Automotive AEC-Q200", Depth=1.25mm, Contact Plating=Tin, Construction=Rectangular, Case Code (Imperial)=0805, Length=2mm
R16: library part CMP-26527-002331-1, "1kΩ ±1% 0.125W 0805 Thick Film Chip Resistor AEC-Q200 compliant", Case/Package=0805, Power Rating=125mW, Resistance=1kR, Tolerance=1%, Min Operating Temperature=-55°C, Resistor Type="Thick Film", Max Operating Temperature=155°C, Case Code (Metric)=2012, Temperature Coefficient=100ppm/°C, Lead Free="Lead Free", RoHS Compliant=Yes, Military Standard=Not, Mount="Surface Mount", Number of Terminations=2, Series=RMCF, Radiation Hardening=No, Size Code=0805, Max Power Dissipation=125mW, Packaging="Tape and Reel", Width=0.049inch, Height=0.026inch, Features="Automotive AEC-Q200", Depth=1.25mm, Contact Plating=Tin, Construction=Rectangular, Case Code (Imperial)=0805, Length=2mm
R17: library part CMP-26527-001731-1, "100Ω ±1% 0.125W 0805 Thick Film Chip Resistor AEC-Q200 compliant, RMCF0805FT100R", Min Operating Temperature=-55°C, Resistor Type="Thick Film", Power Rating=250mW, Temperature Coefficient=100ppm/°C, Max Operating Temperature=155°C, Case/Package=0805, Case Code (Metric)=2012, Tolerance=1%, Max Power Dissipation=125mW, Size Code=0805, Series=RMCF, RoHS Compliant=Yes, Resistance=100R, Radiation Hardening=No, Packaging="Tape and Reel", Number of Terminations=2, Mount="Surface Mount", Military Standard=Not, Width=0.049inch, Length=2mm, Lead Free="Lead Free", Height=0.026inch, Features="Automotive AEC-Q200", Depth=1.25mm, Contact Plating=Tin, Construction=Rectangular, Case Code (Imperial)=0805
R18 R21: library part CMP-26527-000121-1, "RES 10K OHM 1% 1/8W 0805, RMCF0805FT10K0", Power Rating=125mW, Resistance=10kR, Temperature Coefficient=100ppm/°C, Tolerance=1%, Case Code (Imperial)=0805, Case Code (Metric)=2012, Max Operating Temperature=155°C, Resistor Type="Thick Film", Min Operating Temperature=-55°C, Height=0.026inch, Lead Free="Lead Free", Series=RMCF, Case/Package=0805, Construction=Rectangular, Contact Plating=Tin, Depth=1.25mm, Features="Automotive AEC-Q200", Length=2mm, Width=0.049inch, Mount="Surface Mount", Size Code=0805, Number of Terminations=2, Packaging="Tape and Reel", Radiation Hardening=No, Max Power Dissipation=125mW, RoHS Compliant=Yes, Military Standard=Not
R19: library part CMP-26527-001731-1, "100Ω ±1% 0.125W 0805 Thick Film Chip Resistor AEC-Q200 compliant, RMCF0805FT100R", Case/Package=0805, Power Rating=250mW, Tolerance=1%, Max Power Dissipation=125mW, Resistor Type="Thick Film", Min Operating Temperature=-55°C, Max Operating Temperature=155°C, Case Code (Metric)=2012, Temperature Coefficient=100ppm/°C, Lead Free="Lead Free", Resistance=100R, RoHS Compliant=Yes, Series=RMCF, Radiation Hardening=No, Packaging="Tape and Reel", Number of Terminations=2, Mount="Surface Mount", Military Standard=Not, Size Code=0805, Width=0.049inch, Height=0.026inch, Features="Automotive AEC-Q200", Depth=1.25mm, Contact Plating=Tin, Construction=Rectangular, Case Code (Imperial)=0805, Length=2mm
R23 R26 R27: library part CMP-26527-000121-1, "RES 10K OHM 1% 1/8W 0805, RMCF0805FT10K0", Power Rating=125mW, Resistance=10kR, Case/Package=0805, Min Operating Temperature=-55°C, Temperature Coefficient=100ppm/°C, Resistor Type="Thick Film", Max Operating Temperature=155°C, Tolerance=1%, Case Code (Metric)=2012, Radiation Hardening=No, Number of Terminations=2, Mount="Surface Mount", Packaging="Tape and Reel", RoHS Compliant=Yes, Series=RMCF, Size Code=0805, Military Standard=Not, Width=0.049inch, Length=2mm, Lead Free="Lead Free", Height=0.026inch, Features="Automotive AEC-Q200", Depth=1.25mm, Contact Plating=Tin, Construction=Rectangular, Case Code (Imperial)=0805, Max Power Dissipation=125mW
R24: library part CMP-26527-001731-1, "100Ω ±1% 0.125W 0805 Thick Film Chip Resistor AEC-Q200 compliant, RMCF0805FT100R", Power Rating=250mW, Case/Package=0805, Min Operating Temperature=-55°C, Temperature Coefficient=100ppm/°C, Resistor Type="Thick Film", Max Operating Temperature=155°C, Tolerance=1%, Case Code (Metric)=2012, Max Power Dissipation=125mW, Radiation Hardening=No, Number of Terminations=2, Mount="Surface Mount", Packaging="Tape and Reel", Resistance=100R, RoHS Compliant=Yes, Series=RMCF, Size Code=0805, Military Standard=Not, Width=0.049inch, Length=2mm, Lead Free="Lead Free", Height=0.026inch, Features="Automotive AEC-Q200", Depth=1.25mm, Contact Plating=Tin, Construction=Rectangular, Case Code (Imperial)=0805
R25: library part CMP-2001-00434-1, "ERJ-6GEYJ563V", Manufacturer=Panasonic, Part Number=ERJ-6GEYJ563V
SW1: library part CMP-71745-000011-1, "SWITCH SLIDE DPDT 200MA 12V", Current Rating=200mA, Max Operating Temperature=85°C, Min Operating Temperature=-40°C, Operating Force=153gf, Voltage Rating (DC)=12V, Actuator Length=2mm, Actuator Material=Nylon, Actuator Type=Standard, Contact Material=Copper, Contact Plating=Silver, Contact Style=Non-Shorting, Electrical Life=10000Cycles, Mount="Surface Mount", Packaging="Cut Tape", Series=CL-SB, Switch Function=On-On, Switch Travel=2mm, Throw Configuration=DPDT
SW2 SW3 SW4: library part CMP-1457-00011-3, "Tactile Switch, 0.05A, 12Vdc, 160Gf, Smd Rohs Compliant: Yes", Current Rating=50mA, Insulation Resistance=100MΩ, Max Operating Temperature=85°C, Min Operating Temperature=-40°C, Voltage Rating=12V, Actuator Material="Liquid Crystal Polymer, Polymer", Contact Plating=Silver, Height=3.1mm, Illumination Type=Non-Illuminated, Mechanical Life=1Mcycles, Mount="Surface Mount", Packaging="Tape and Reel", RoHS=Compliant, Switch Function=Off-Mom, Switch Travel=250µm, Termination=SMD/SMT, Throw Configuration=SPST
U1 U3: library part CMP-1310-00171-1, "Single Supply Quad Operational Amplifier, 3 to 32 V, 0 to 70 degC, 14-Pin SOIC, Pb-Free, Tape and Reel", Manufacturer="On Semiconductor", ComponentLink1Description="Manufacturer URL", ComponentLink1URL=http://www.onsemi.com/, ComponentLink2Description=Datasheet, ComponentLink2URL=http://www.onsemi.cn/pub_link/Collateral/LM324-D.PDF, ComponentLink3Description="Package Specification", ComponentLink3URL=http://www.onsemi.com/pub_link/Collateral/751A-03.PDF, DatasheetVersion="Rev. 25", Mounting Technology="Surface Mount", PackageDescription="14-Pin Small Outline Integrated Circuit, Body 8.65 x 3.9 mm, Pitch 1.27 mm", PackageReference=SOIC-14-751A-03, PackageVersion="Rev. K, 05/2011", Packing="Tape and Reel", PartNumber=LM324DR2G, RoHS=TRUE, VCC Max (V)=32, VCC Min (V)=3
U2: library part CMP-0244-00307-2, "IC REG LINEAR 3.3V 800MA SOT223", Case/Package=SOT-223, Dropout Voltage=1.1V, Input Bias Current=5mA, Max Input Voltage=15V, Max Operating Temperature=125°C, Max Output Current=1.3A, Max Output Voltage=3.3V, Max Power Dissipation=12W, Min Input Voltage=5.3V, Min Operating Temperature=-40°C, Output Current=950mA, Output Voltage Accuracy=1%, Package Quantity=1, Quiescent Current=10mA, Accuracy=1%, Contact Plating=Tin, Height=1.8mm, Lead Free="Lead Free", Length=6.5mm, Max Supply Voltage=15V, Min Output Voltage=3.3V, Min Supply Voltage=3.3V, Mount="Surface Mount", Nominal Output Voltage=3.3V, Number of Outputs=1, Number of Pins=4, Number of Regulators=1, Number of Terminals=4, Output Type=Fixed, Output Voltage=3.3V, Packaging="Tape and Reel", Polarity=Positive, Power Dissipation=12W, Radiation Hardening=No, REACH SVHC="No SVHC", Termination=SMD/SMT, Weight=0.01lb, Width=3.5mm

## Via types
v1: diameter 0.6, hole 0.3, Top Layer to Bottom Layer, 55 vias

## Nets (pads, with @x,y where several pads share a name; then routed paths per layer and width w, separated by ;. In a path a pad name is that pad's centre, name@x,y a point inside that pad or via, vN(x,y) a via of type N, cw(c..) or ccw(c..) an arc to the next point about the centre after c; other vN are vias at no path point)
+3V3: C7.1 D1.2 D4.2 D6.2 D7.2 D8.2 J1.1 J6.1 P1.1 R1.1 SW2.A1 SW3.A1 SW4.A1 U1.11 U2.2 U3.11 | length 227.6
  Top Layer w0.5: v1(8.915,71.415) 11.441,71.415 12.5,72.474 U1.11 ; v1(10.489,57.641) J1.1 ; v1(11.158,86.216) 12.5,86.216 ; v1(11.946,86.77) 12.5,86.216 ; R1.1 15.01,81.75 12.5,84.26 U3.11 12.5,86.216 ; v1(19.87,57.641) 20.03,57.8 U2.2 v1(21,62.467) ; v1(31.529,91.651) 33.75,93.872 SW2.A1 33.75,98.687 34.055,98.992 41.75,98.992 ; P1.1 41.912,60.332 ; SW3.A1 41.75,98.992 ; SW4.A1 49.75,98.992 ; J6.1 48.99,37.372 45.27,37.372 44.864,37.778 44.864,44.28 37.65,51.494 37.65,56.676 37.32,57.006 37.32,60.282 37.752,60.714 40.494,60.714 40.876,60.332 41.912,60.332 ; D4.2 55.482,75.421 D8.2 ; 41.75,98.992 49.75,98.992 ; 41.912,60.332 C7.1 44.788,60.332 44.788,72.069 D1.2 45.944,77.695 46.896,78.647 51.294,78.647 D8.2 ; 49.75,98.992 55.024,98.992 55.482,98.534 D7.2 D6.2 D8.2
  Bottom Layer w0.35: v1(8.915,71.415) 6.752,73.579 ; v1(10.489,57.641) v1(19.87,57.641) ; v1(11.158,86.216) 6.752,81.809 6.752,73.579 ; v1(11.946,86.77) 11.946,90.839 12.758,91.651 v1(31.529,91.651) ; v1(21,62.467) 10.904,62.467 6.752,66.619 6.752,73.579
GND: B-.1 C2.1 C4.1 C6.1 C7.2 C8.1 C9.1 J1.3 J2.2 J2.3 J7.1 J11.2 P1.2 Q1.2 Q2.2 Q3.2 Q5.2 R4.2 R6.2 R9.1 R10.2 R13.2 R18.2 R21.2 R22.2 R23.2 R25.1 R26.2 R27.2 SW1.3 SW1.6 SW2.G1 SW3.G1 SW4.G1 U1.4 U2.1 U3.4 | length 381.9
  Top Layer w0.508: C2.1 11.246,74.85 11.539,74.557 14.384,74.557 14.79,74.964 14.79,75.447 14.994,75.65 C4.1 16.822,75.65 17.026,75.447 17.026,72.144 15.146,70.265 13.012,70.265 12.5,69.752 12.5,68.618 ; J1.3 11.759,57.031 ; U1.4 12.5,68.618 ; U3.4 12.5,80.602 12.068,81.034 9.558,81.034 7.983,82.609 7.983,86.534 ; J11.2 11.869,90.42 ; U2.1 18.7,53.524 17.305,52.129 12.352,52.129 11.759,52.722 11.759,57.031 ; C6.1 22.69,75.65 v1(24.214,77.173) ; R4.2 20.196,81.75 19.413,82.533 17.838,82.533 17.584,82.787 17.584,85.682 17.788,85.886 20.103,85.886 20.989,85 R6.2 v1(23.807,85) 24.417,85.61 32.266,85.809 R23.2@33.25,86.794 ; Q5.2 31.97,38.353 32.824,37.499 40.638,37.499 B-.1 ; R27.2 33.25,85.251 R23.2 R23.2@33.25,86.794 ; SW2.G1 36,96.807 36.736,96.071 36.838,96.071 ; C9.1 36.33,74.202 39.987,74.202 ; R21.2 R18.2@38.438,79.813 ; v1(38.438,78.774) R18.2@38.438,79.813 ; SW1.3 SW1.6 39,57.872 38.54,58.332 P1.2 39.994,58.046 42.247,58.046 43.032,58.832 C7.2 C7.2@44.889,58.832 ; R25.1 39.987,74.202 ; v1(40.394,74.608) 39.987,74.202 ; v1(40.662,74.202) 39.987,74.202 ; R26.2 39.835,79.813 R18.2 ; Q2.2 42.361,86.698 41.827,87.232 40.597,87.435 40.597,88.496 ; SW3.G1 44,96.071 ; Q3.2 45.913,86.807 v1(46.21,87.105) v1(46.49,87.384) ; J2.3 44.889,56.2 C7.2@44.889,58.832 ; J7.1 49,41.5 J2.2 49,65.159 50.083,66.243 ; SW4.G1 52,96.705 51.366,96.071 ; C8.1 55.278,68.339 54.373,67.435 ; 7.983,86.534 11.869,90.42 ; 7.983,86.534 7.17,85.721 7.17,71.331 9.533,68.969 ; 7.983,86.534 7.983,89.543 8.86,90.42 11.869,90.42 ; 9.533,68.969 12.149,68.969 12.5,68.618 ; 9.533,68.969 8.288,68.969 7.983,68.664 7.983,57.031 8.796,56.218 10.946,56.218 11.759,57.031 ; R23.2@33.25,86.794 R22.2 33.25,88.047 34.694,89.086 36,90.392 36,95.233 36.838,96.071 ; 36.838,96.071 44,96.071 ; R18.2@38.438,79.813 R18.2 ; R18.2 38.92,82.939 38.799,83.061 Q1.2 38.799,86.698 40.597,88.496 ; 40.597,88.496 40.597,94.42 41.41,95.233 50.528,95.233 51.366,96.071 ; 44,96.071 51.366,96.071 ; C7.2@44.889,58.832 45.989,59.47 R10.2 48.141,65.806 48.577,66.243 50.083,66.243 ; 50.083,66.243 R9.1 52.248,64.753 54.211,64.753 55.278,65.82 55.278,66.53 54.373,67.435 ; 54.373,67.435 54.211,67.597 R13.2 54.373,67.435
  Bottom Layer w0.508: J11.2 16.449,87.511 21.296,87.511 v1(23.807,85) 24.214,84.594 v1(24.214,77.173) ; v1(38.438,78.774) 46.286,86.622 46.286,87.029 v1(46.21,87.105) ; P1.2 38.54,67.622 40.394,69.476 v1(40.394,74.608) ; v1(40.662,74.202) 46.49,80.029 v1(46.49,87.384) ; B-.1 44.305,39.14 44.445,39 J7.1
NetB+_1: B+.1 Q4.3 R14.1 SW1.2 | length 35.4
  Top Layer w0.5: R14.1 31.976,69.944 32.266,69.655 33.078,69.655 34.046,68.687 Q4.3 v1(34.046,65.159) ; v1(34.78,63.46) 34.78,57.971 35.466,57.285 35.466,53.254 35.72,53 SW1.2 36.5,46.78 38.5,44.78 38.5,42.405 37.933,41.838 B+.1
  Bottom Layer w0.35: v1(34.046,65.159) 34.78,64.425 v1(34.78,63.46)
NetC1_1: C1.1 R2.2 R3.1 | length 17.1
  Top Layer w0.5: v1(7.882,75.243) 9,75.243 C1.1 ; v1(13.876,69.249) 13.877,69.25 R3.1 R2.2
  Bottom Layer w0.35: v1(7.882,75.243) v1(13.876,69.249)
NetC1_2: C1.2 J3.1 J10.13 U3.1 U3.2 | length 39.8
  Top Layer w0.5: C1.2 9,78.418 8.69,78.728 U3.1 U3.2 9.96,78.854 v1(9.964,78.85) ; J10.13 30.259,70.479 30.259,74.259 J3.1
  Bottom Layer w0.35: v1(9.964,78.85) 10.599,79.485 14.79,79.485 17.788,76.488 24.493,76.488 25.941,77.935 32.065,77.935 J3.1
NetC2_2: C2.2 R3.2 U3.3 | length 18.2
  Top Layer w0.5: U3.3 11.23,78.358 v1(11.246,78.342) C2.2 ; R3.2 v1(19.997,67.75)
  Bottom Layer w0.35: v1(11.246,78.342) 11.246,76.501 v1(19.997,67.75)
NetC3_1: C3.1 R7.2 R8.1 | length 18
  Top Layer w0.5: v1(12.699,78.486) 12.377,78.164 12.377,75.929 12.656,75.65 C3.1 ; v1(19.659,71.75) R7.2 R8.1
  Bottom Layer w0.35: v1(12.699,78.486) 12.923,78.486 v1(19.659,71.75)
NetC3_2: C3.2 J4.1 J10.14 U3.7 | length 30.4
  Top Layer w0.5: C3.2 14.206,77.35 14.206,78.164 14.613,78.57 15.904,78.57 16.31,78.977 U3.7 16.645,79.84 17.026,79.459 25.839,79.459 27.617,77.681 27.617,77.351 ; J10.14 27.617,73.143 27.617,77.351 ; J4.1 30.215,78.215 28.481,78.215 27.617,77.351
NetC4_2: C4.2 R8.2 U3.5 | length 36
  Top Layer w0.5: v1(13.468,80.855) 13.77,80.554 U3.5 ; C4.2 16.553,77.35 16.961,77.758 v1(16.961,78.324) ; v1(20.429,69.884) 20.429,68.69 21.369,67.75 R8.2
  Bottom Layer w0.35: v1(13.468,80.855) 10.32,80.78 9.596,80.056 ; v1(16.961,78.324) 15.229,80.056 9.596,80.056 ; v1(20.429,69.884) 19.21,69.884 15.11,73.488 12.192,76.406 11.946,78.969 10.93,78.969 10.32,78.215 9.685,78.215 9.329,78.57 9.329,79.79 9.596,80.056
NetC5_1: C5.1 J10.16 J11.1 U3.8 U3.9 | length 55.5
  Top Layer w0.5: U3.9 U3.8 16.31,90.42 J11.1 ; C5.1 18.199,74.299 v1(18.321,74.176)
  Bottom Layer w0.35: J11.1 24.138,90.42 27.389,87.169 27.389,81.441 28.202,80.628 30.437,80.628 31.834,79.231 33.51,79.231 34.577,78.164 34.577,76.132 33.891,75.446 30.394,75.446 J10.16 26.336,74.176 v1(18.321,74.176)
NetC5_2: C5.2 R28.2 R29.1 | length 15.3
  Top Layer w0.5: C5.2 19.058,77.35 19.337,77.071 19.337,74.913 19.616,74.633 23.96,74.633 24.493,74.1 24.493,73.275 R28.2 25.154,73.275 25.408,73.021 25.408,69.504 25.154,69.25 R29.1
NetC6_2: C6.2 R29.2 U3.10 | length 34.5
  Top Layer w0.5: U3.10 v1(13.77,86.808) ; v1(21.242,78.748) 20.503,78.01 C6.2 22.986,77.35 23.511,77.876 25.237,77.876 26.728,76.385 26.728,68.715 25.763,67.75 R29.2
  Bottom Layer w0.35: v1(13.77,86.808) 16.293,84.285 20.81,84.285 21.242,83.854 v1(21.242,78.748)
NetC8_2: C8.2 D2.1 D3.2 D5.1 U2.3 | length 52.3
  Top Layer w0.5: v1(23.3,52.866) U2.3 ; v1(48.348,68.186) D2.1 48.806,71.275 D3.2 52.706,71.275 D5.1 55.675,70.519 C8.2
  Bottom Layer w0.35: v1(23.3,52.866) 32.291,52.866 34.958,55.533 36.685,55.533 39.809,58.657 39.809,62.899 41.206,64.296 44.458,64.296 v1(48.348,68.186)
NetC9_2: C9.2 J10.15 R15.2 R25.2 | length 18.2
  Top Layer w0.5: v1(34,74.3) R15.2 34,72.068 34.254,71.814 37.682,71.814 37.936,72.068 C9.2 39.122,71.814 42.082,71.814 42.336,72.068 R25.2
  Bottom Layer w0.35: J10.15 v1(34,74.3)
NetD1_1: D1.1 R10.1 | length 2.2
  Top Layer w0.5: D1.1 45.944,68.658 45.989,68.614 R10.1
NetD2_2: D2.2 J5.1 SW1.1 | length 66.9
  Top Layer w0.5: SW1.1 34,47.862 37.777,44.084 v1(37.777,43.112) ; D2.2 48.348,75.192 48.5,75.344 J5.1@48.5,77
  Bottom Layer w0.35: v1(37.777,43.112) 43.467,43.112 56.294,55.939 56.294,75.73 55.024,77 J5.1@48.5,77
NetD3_1: D3.1 R9.2 | length 1.9
  Top Layer w0.5: D3.1 50.756,68.743 50.758,68.741 R9.2
NetD4_1: D4.1 R13.1 | length 5.3
  Top Layer w0.5: R13.1 52.382,65.845 52.179,66.048 52.179,68.619 D4.1
NetD5_2: D5.2 J8.1 SW1.4 | length 61.9
  Top Layer w0.5: J8.1 33.68,46.701 32.977,47.405 32.977,53.976 34,54.999 SW1.4 ; D5.2 55.65,72.407 v1(55.659,72.398)
  Bottom Layer w0.35: J8.1 37.104,42.564 37.104,43.48 42.73,49.106 44.458,49.106 45.372,50.021 45.372,52.104 55.659,62.391 v1(55.659,72.398)
NetD6_1: D6.1 R11.1 | length 8.6
  Top Layer w0.5: R11.1 46.693,82.549 46.947,82.803 46.947,85.073 47.208,85.334 D6.1
NetD7_1: D7.1 R12.1 | length 4.3
  Top Layer w0.5: R12.1 50.52,86.372 D7.1
NetD8_1: D8.1 R20.1 | length 3.8
  Top Layer w0.5: R20.1 49.995,82.525 50.304,82.834 D8.1
NetJ1_2: J1.2 U1.10 | length 13.4
  Top Layer w0.5: J1.2 v1(10.489,66.826) ; U1.10 13.77,72.072 v1(14.105,71.738)
  Bottom Layer w0.35: v1(10.489,66.826) 13.41,66.826 14.511,67.928 14.511,71.331 v1(14.105,71.738)
NetJ1_4: J1.4 U1.5 | length 9.5
  Top Layer w0.5: J1.4 11.759,62.111 12.063,61.806 13.571,61.806 13.825,62.06 13.825,66.933 13.77,66.988 U1.5
NetJ1_5: J1.5 J9.2 | length 29.4
  Top Layer w0.5: v1(13.029,52.916) J1.5
  Bottom Layer w0.35: J9.2 1.913,42.447 1.913,52.231 2.598,52.916 v1(13.029,52.916)
NetJ1_6: J1.6 U1.3 | length 5.1
  Top Layer w0.5: U1.3 11.23,66.836 13.029,65.037 J1.6
NetJ2_1: J2.1 SW1.5 | length 9
  Top Layer w0.5: v1(36.5,54.575) SW1.5
  Bottom Layer w0.35: v1(36.5,54.575) 39.581,51.494 43,51.494 J2.1
NetJ9_3: J9.3 P1.3 | length 40.2
  Bottom Layer w0.35: J9.3 12.607,43.9 23.934,55.228 32.926,55.228 35.364,57.666 35.364,58.864 P1.3
NetJ9_6: J9.6 P1.4 | length 35.7
  Top Layer w0.5: J9.6 4.173,52.693 v1(4.173,55.964)
  Bottom Layer w0.35: v1(4.173,55.964) 24.468,55.964 26.398,57.895 31.855,57.895 P1.4
NetJ9_13: J9.13 R16.1 | length 37.8
  Top Layer w0.5: J9.13 4.859,67.441 4.859,56.549 9.939,51.469 23.325,51.469 24.537,52.681 R16.1
NetJ10_6: J10.6 R17.1 R18.1 | length 39
  Top Layer w0.5: J10.6 30.183,52.623 v1(30.183,62.873) ; v1(38.133,76.437) 38.133,77.713 R18.1 39.708,77.713 39.708,78.367 39.911,78.57 41.384,78.57 41.943,79.129 41.943,81.415 41.359,81.999 R17.1
  Bottom Layer w0.35: v1(30.183,62.873) 30.183,64.33 37.015,71.163 37.015,75.319 v1(38.133,76.437)
NetJ10_8: J10.8 R24.1 R26.1 | length 36.5
  Top Layer w0.5: R26.1 41.968,77.713 43.15,78.895 ; v1(41.929,77.529) 43.15,78.75 43.15,78.895 ; R24.1 43.15,78.895
  Bottom Layer w0.35: J10.8 32.872,56.52 34.602,58.25 34.602,59.825 37.549,62.772 37.549,69.198 39.2,70.849 39.2,74.799 v1(41.929,77.529)
NetJ10_9: J10.9 R27.1 SW4.B2 | length 74.3
  Top Layer w0.5: R27.1 35.35,82.965 34.831,82.446 34.831,76.132 35.923,75.04 38.87,75.04 ; v1(37.701,74.913) 38.743,74.913 38.87,75.04 ; SW4.B2 54.25,82.736 ; 38.87,75.04 39.682,75.853 40.495,75.853 ; 38.87,75.04 39.682,75.04 40.495,75.853 ; 40.495,75.853 41.283,76.64 43.34,76.64 ; 40.495,75.853 42.553,75.853 43.34,76.64 ; 43.34,76.64 43.899,76.64 46.566,79.307 ; 43.34,76.64 46.007,79.307 46.566,79.307 ; 46.566,79.307 50.821,79.307 ; 50.821,79.307 54.25,82.736 ; 50.821,79.307 50.833,79.307 54.25,82.724 54.25,82.736
  Bottom Layer w0.35: J10.9 31.224,61.284 31.224,64.442 37.701,70.919 v1(37.701,74.913)
NetJ10_10: J10.10 R23.1 SW3.B2 | length 54.7
  Top Layer w0.5: v1(34.298,85.093) 34.298,85.276 R23.1 ; v1(46.25,89.035) SW3.B2
  Bottom Layer w0.35: J10.10 27.897,62.703 27.897,67.598 28.43,68.131 29.827,68.131 30.107,68.41 30.107,68.822 35.079,73.795 35.079,82.025 34.552,82.552 33.44,82.552 33.155,82.838 33.155,87.918 34.272,89.035 38.743,89.035 ; v1(34.298,85.093) 34.8,85.093 38.743,89.035 ; v1(46.25,89.035) 38.743,89.035
NetJ10_11: J10.11 R19.1 R21.1 | length 23.6
  Top Layer w0.5: v1(36.711,76.742) R21.1@36.711,77.713 ; R21.1 R21.1@36.711,77.713 ; R19.1 36.33,81.999 35.491,81.161 35.491,78.551 R21.1@36.711,77.713
  Bottom Layer w0.35: J10.11 36.349,71.489 36.349,76.538 36.553,76.742 v1(36.711,76.742)
NetJ10_12: J10.12 R22.1 SW2.B2 | length 30.7
  Top Layer w0.5: v1(34.298,87.816) 35.35,87.816 R22.1 36.574,88.476 38.25,90.153 SW2.B2
  Bottom Layer w0.35: J10.12 29.854,66.68 35.593,72.419 35.593,82.228 33.663,84.158 33.663,87.181 v1(34.298,87.816)
NetQ1_1: Q1.1 R19.2 | length 2.5
  Top Layer w0.5: Q1.1 36.899,85.375 37.48,84.793 R19.2
NetQ1_3: Q1.3 R12.2 | length 12.1
  Top Layer w0.5: 37.849,87.033 Q1.3 ; v1(45.942,88.124) R12.2
  Bottom Layer w0.35: 37.849,87.033 37.854,87.029 44.846,87.029 v1(45.942,88.124)
NetQ2_1: Q2.1 R17.2 | length 2.3
  Top Layer w0.5: R17.2 40.315,84.997 40.461,85.142 Q2.1
NetQ2_3: Q2.3 R11.2 | length 7.6
  Top Layer w0.5: Q2.3 43.049,88.234 43.924,87.359 44.585,87.359 44.839,87.105 44.839,84.53 45.067,84.301 R11.2
NetQ3_1: Q3.1 R24.2 | length 2.6
  Top Layer w0.5: R24.2 43.15,84.641 44.013,85.503 Q3.1
NetQ3_3: Q3.3 R20.2 | length 23
  Top Layer w0.5: Q3.3@44.963,88.234 44.963,91.598 45.27,91.905 50.808,91.905 53.144,89.569 53.144,84.158 48.329,84.158 R20.2
NetQ4_1: Q4.1 Q5.3 R14.2 | length 14.3